# EAGLE board v1 (EAGLE 7.3.0)
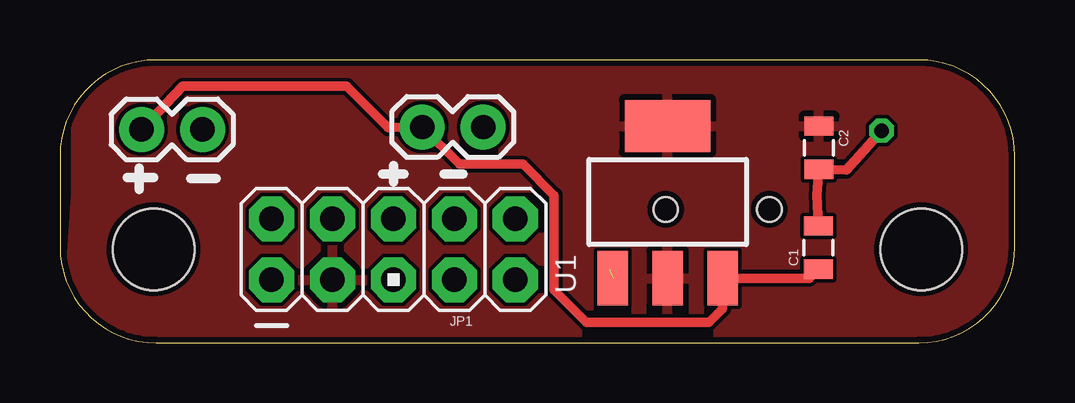
[diagram p0: board, top side]
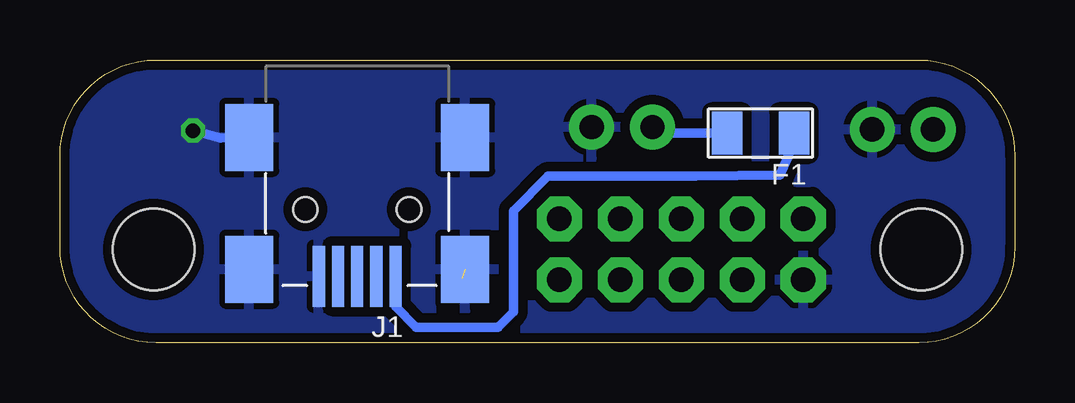
[diagram p1: board, bottom side, seen from below]

Size 39.8 x 11.8 mm. Coordinates in mm from the lower left corner, seen from the top.
Outline: 0,7.8 0,4 arc90 4,0 35.8,0 arc90 39.8,4 39.8,7.8 arc90 35.8,11.8 4,11.8 arc90 0,7.8
Copper layers (1*16): Top 0.035mm / dielectric 1.5mm / Bottom 0.035mm
Design rules "DFRobot_Eagle_Rule_v0.4": minimum track width 6mil, minimum drill 12mil, track to track 6mil, track to pad 6mil, pad to pad 6mil, via to via 6mil, smd to smd 0mil, copper to edge 10mil, drill to drill 10mil, minimum pad ring 12mil, minimum via ring 8mil, stop-mask expansion 2mil, vias tented up to drill 25mil, thermal gap 10mil
Holes 3.4 mm at 3.9,3.9 35.9,3.9

## Footprints (pad centres in the part's own frame; a part is rotated, then mirrored left to right if it is on the bottom)
0805 = smd 0.8 x 1.2: 1 -0.9,0; 2 0.9,0
F1206 = smd 1.27 x 1.778: 1 -1.397,0; 2 1.397,0
MINIUSB5+4P-SMD-0.8-90D = smd 2.54 x 0.508: 1 0.381,-1.6; 2 0.381,-0.8; 3 0.381,0; 4 0.381,0.8; 5 0.381,1.6 | smd 2.794 x 2: P$1 6.175,4.5; P$2 6.175,-4.5; P$3 0.675,4.5; P$4 0.675,-4.5 | hole 1.016: 3.175,-2.159; 3.175,2.159
AVR_ICSP = drill 1.016 pad 1.88 octagon: 1 -1.27,5.08; 2 1.27,5.08; 3 -1.27,2.54; 4 1.27,2.54; 5 -1.27,0; 6 1.27,0; 7 -1.27,-2.54; 8 1.27,-2.54; 9 -1.27,-5.08; 10 1.27,-5.08
1X02 = drill 1.016 pad 1.88: 1 0,0; 2 2.54,0
SOT-223 = smd 1.27 x 2.286: 1 -2.286,-3.175; 2 0,-3.175; 3 2.286,-3.175 | smd 3.556 x 2.159: TER 0,3.175

## Placement (x,y rotation side)
C1  [0805]  31.61,3.97 90 top
C2  [0805]  31.64,8.14 270 top
F1  500MA  [F1206]  10.6,8.75 180 bottom
J1  [MINIUSB5+4P-SMD-0.8-90D]  27.41,2.39 90 bottom
JP1  [AVR_ICSP]  13.9,3.9 90 top
JP2  [1X02]  15.1,9 0 top
JP3  [1X02]  3.4,8.9 0 top
U1  PMIC-CJT1117-3.3(SOT223)  [SOT-223]  25.33,5.87 0 top

## Library data of the parts
C1 C2 = SparkFun-Capacitors
F1 = Seeed-OPL-fuse
J1 = Seeed-OPL-Connector; MPN: ST-USB-002A
JP1-JP3 = SparkFun-Connectors
U1 = Seeed-OPL-ic; MPN: CJT1117-3.3

## Nets
GND: C1.2 C2.2 J1.5 J1.P$1 J1.P$2 J1.P$3 J1.P$4 JP1.1 JP2.2 JP3.2 U1.1
N$1: F1.1 J1.1
N$3: C1.1 F1.2 JP2.1 JP3.1 U1.3
VDD: C2.1 JP1.3 U1.2 U1.TER

## Tracks (layer width: path | path; a pad name or v marks a point on that pad's centre or on a via)
GND  (via drill 0.6)  (1 unrouted)
  Top 0.4: C1.2 31.56,6.17 C2.2 32.78,7.2 v34.25,8.85
  Bottom 0.4: v34.25,8.85 33.11,8.54 J1.P$1
  pour Bottom (isolate 0.4): 0.15,0.25 39.45,0.25 39.45,11.3 0.35,11.3 0.35,6.1
N$1
  Bottom 0.4: J1.1 25.81,1.51 24.95,0.65 21.55,0.65 20.9,1.3 20.9,5.5 19.45,6.95 13.3,6.95 9.8,7 9.45,7.75 F1.1
N$3
  Top 0.4: JP3.1 5.12,10.7 11.95,10.7 13.68,8.97 JP2.1 16.65,7.45 19.3,7.45 20.6,6.15 20.6,2.2 21.95,0.85 27.05,0.85 27.62,1.42 U1.3 31.23,2.69 C1.1
  Bottom 0.4: F1.2 14.85,8.75 JP2.1
VDD
  pour Top: 0.25,0.25 39.5,0.25 39.5,11.35 0.65,11.35 0.65,6.2